# Altium PCB somiqboard.PcbDoc (part 10 of 10)
Units mm, origin at the board's own origin, x right, y up, seen from the top; angles counter-clockwise.
Board outline 110 x 96 mm, 4 copper layers (Top Layer, Ground_Plane, Power_Plane, Bottom Layer), stack 1.454 mm thick; 221 components, 356 nets, 1185 pads, 539 vias.
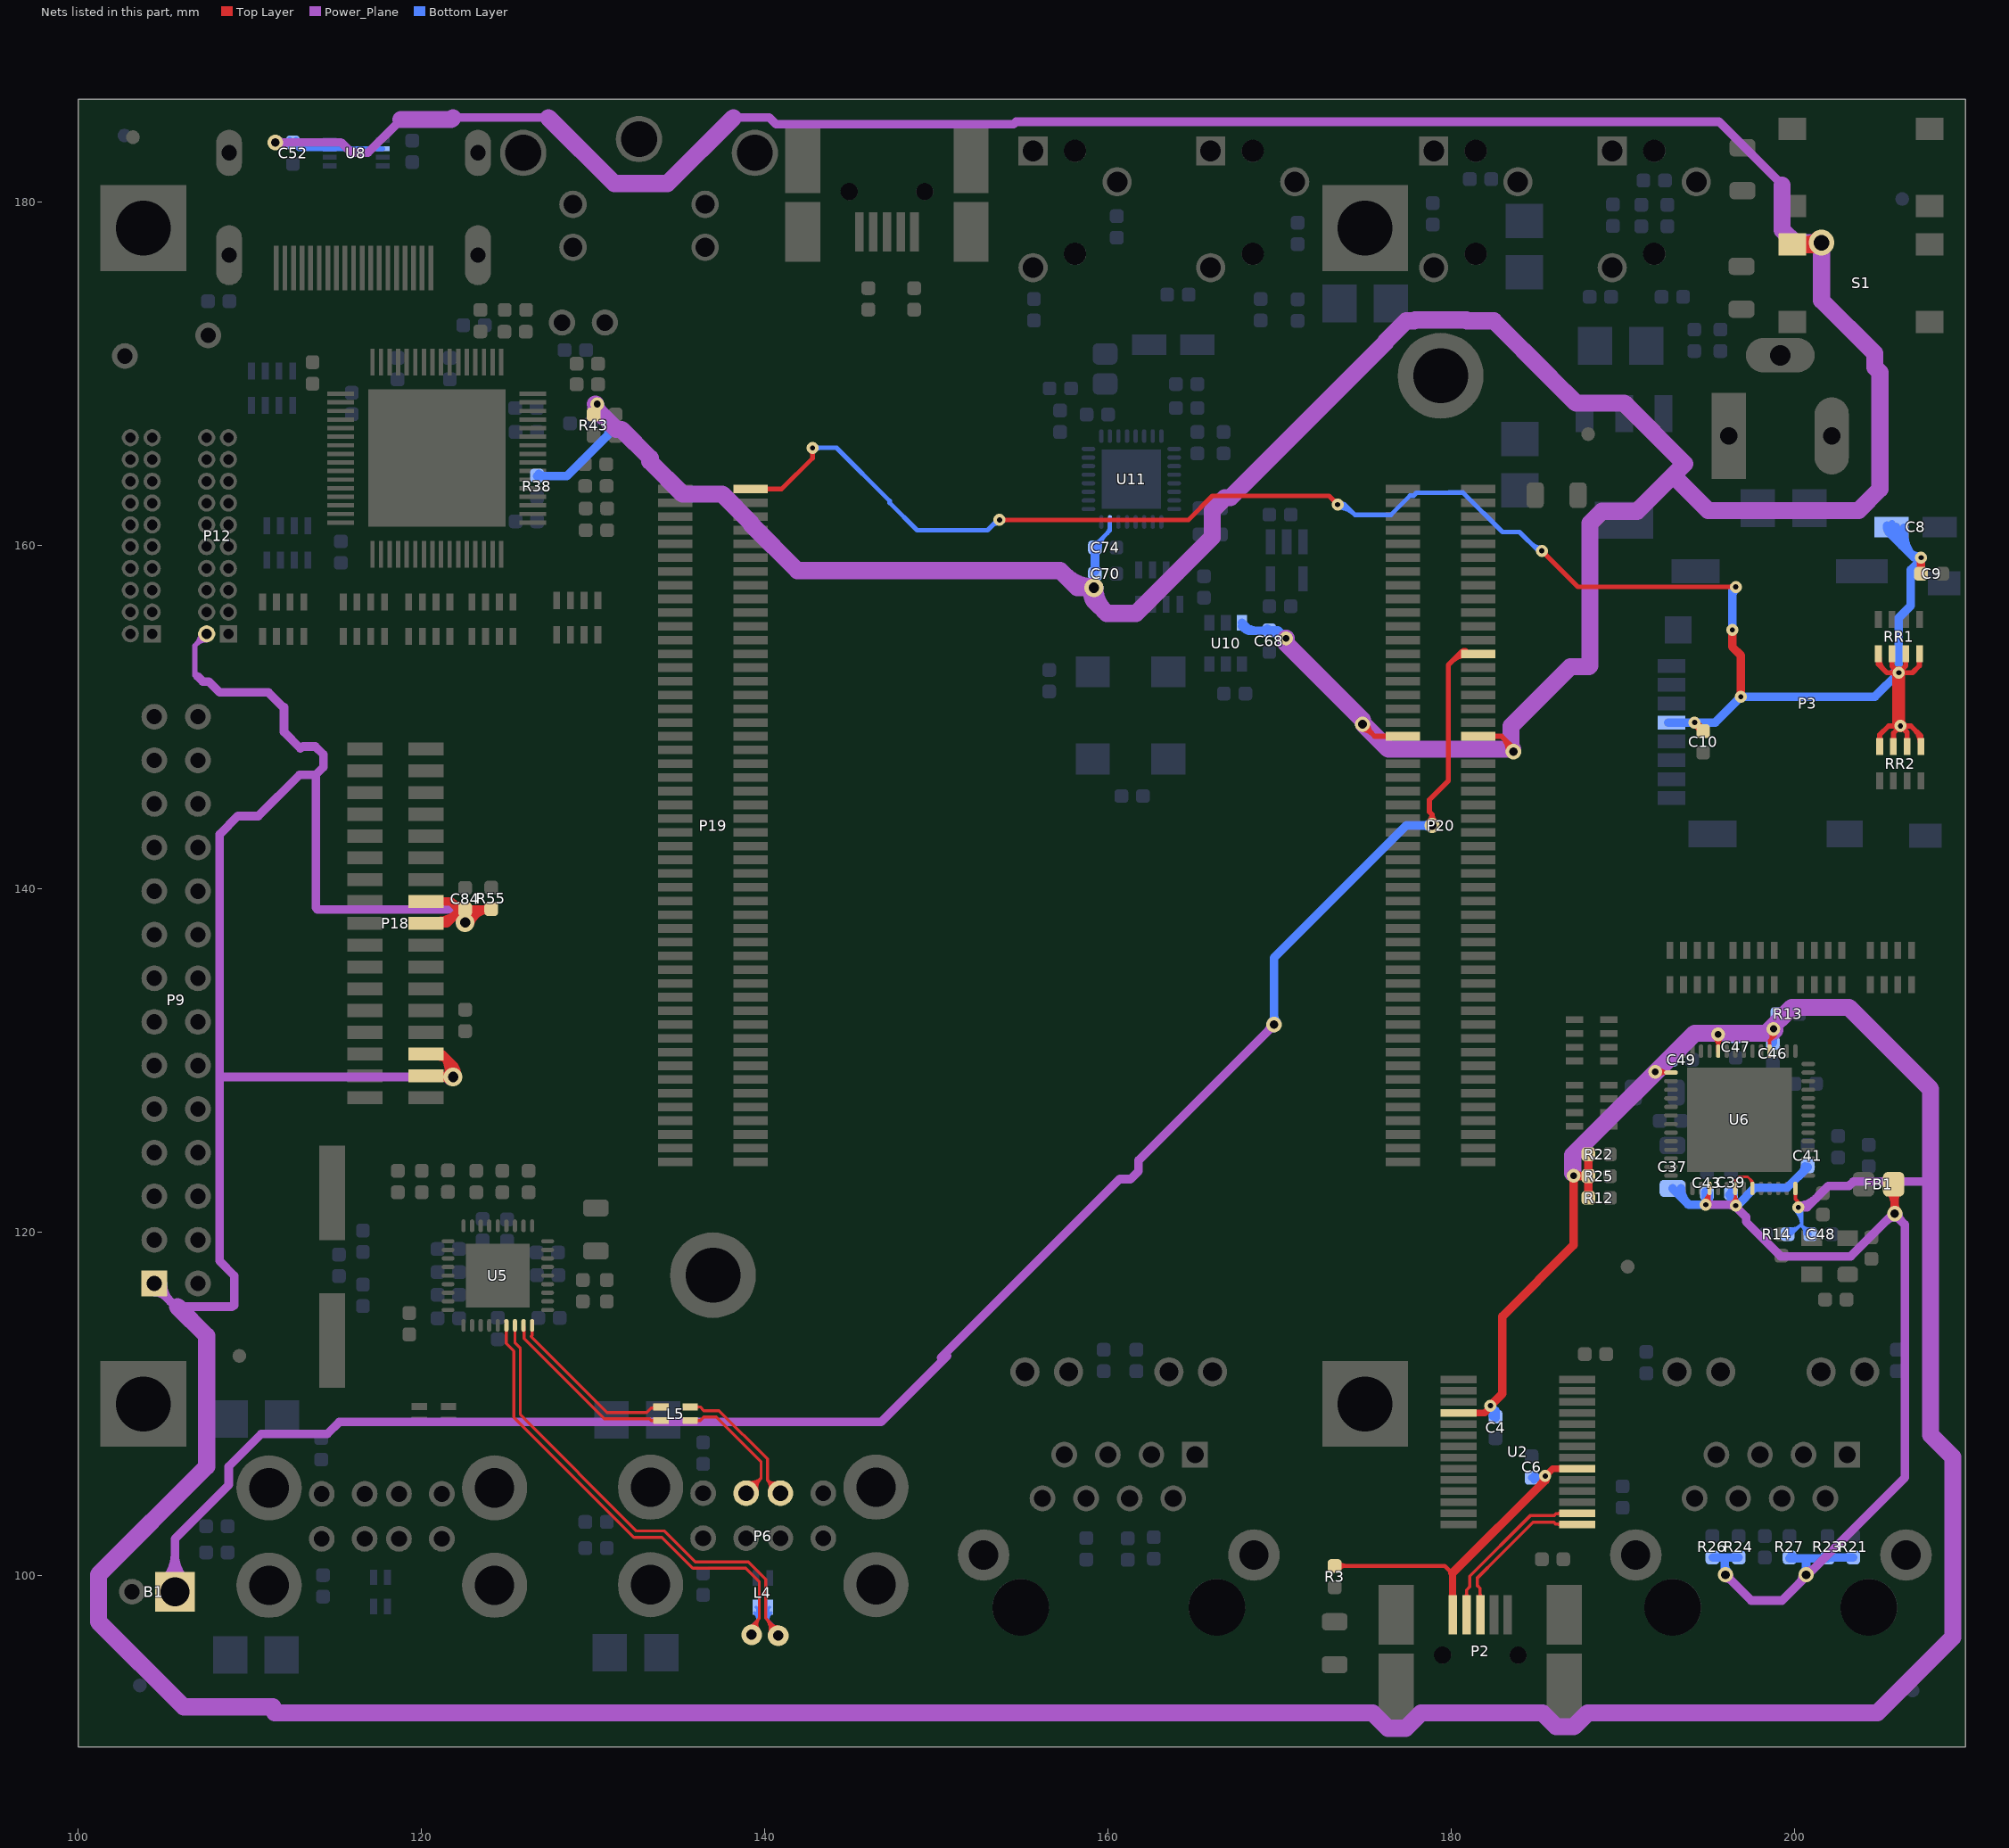
[diagram p12: the nets of this part, all layers, seen from the top]

## Via types
v1: diameter 0.7/0.7/0.7/0.7 (per signal layer), hole 0.3, Top Layer to Bottom Layer, tented both sides, 270 vias
v2: diameter 0.8, hole 0.3, Top Layer to Bottom Layer, tented both sides, 49 vias
v3: diameter 0.6/0.7/0.7/0.6 (per signal layer), hole 0.3, Top Layer to Bottom Layer, tented both sides, 47 vias
v4: diameter 0.6, hole 0.3, Top Layer to Bottom Layer, tented both sides, 43 vias
v5: diameter 1.1/1.1/1.1/1.1 (per signal layer), hole 0.6, Top Layer to Bottom Layer, tented both sides, 32 vias
v6: diameter 0.8/0.8/0.8/0.8 (per signal layer), hole 0.4, Top Layer to Bottom Layer, tented both sides, 31 vias
v7: diameter 0.9/0.9/0.9/0.9 (per signal layer), hole 0.5, Top Layer to Bottom Layer, tented both sides, 29 vias
v8: diameter 1.5/1.5/1.5/1.5 (per signal layer), hole 0.9, Top Layer to Bottom Layer, tented both sides, 14 vias
v9: diameter 1.2/1.2/1.2/1.2 (per signal layer), hole 0.6, Top Layer to Bottom Layer, tented both sides, 10 vias
v10: diameter 0.8/0.8/0.8/0.8 (per signal layer), hole 0.5, Top Layer to Bottom Layer, tented both sides, 6 vias
v11: diameter 1/1/1/1 (per signal layer), hole 0.5, Top Layer to Bottom Layer, tented both sides, 3 vias
v12: diameter 0.8/0.8/0.8/0.8 (per signal layer), hole 0.8, Top Layer to Bottom Layer, tented both sides, 2 vias
v13: diameter 1.2/1.2/1.2/1.2 (per signal layer), hole 1.2, Top Layer to Bottom Layer, tented both sides, 2 vias
v14: diameter 0.6/0.6/0.6/0.6 (per signal layer), hole 0.3, Top Layer to Bottom Layer, tented both sides, 1 vias

## Nets (pads, with @x,y where several pads share a name; then routed paths per layer and width w, separated by ;. In a path a pad name is that pad's centre, name@x,y a point inside that pad or via, vN(x,y) a via of type N, cw(c..) or ccw(c..) an arc to the next point about the centre after c; other vN are vias at no path point) (continued)
USB3_N: L4.1 U5.6 | length 30.4
  Top Layer w0.173: U5.6@124.96,114.499 124.96,113.513 125.4,113.072 125.4,109.222 132.395,102.227 134.023,102.227 135.823,100.427 138.9,100.427 139.7,99.627 139.7,97.514 ; v9@139.186,97 139.7,97.514 ; v9@139.383,96.652 cw(c139.734,96.922) 139.421,97.235 ; v9@139.52,96.757 cw(c139.892,97.043) 139.561,97.374 ; v9@139.657,96.863 cw(c140.05,97.164) 139.7,97.513
  Bottom Layer w0.173: v9@139.186,97 139.6,97.414 139.6,98.062 L4.1@139.503,98.159 ; L4.1@139.423,97.829 cw(c139.002,97.404) 139.6,97.404
  other v9: 139.25,96.55
USB3_P: L4.4 U5.7 | length 34.2
  Top Layer w0.173: U5.7@125.46,114.499 125.46,113.54 125.773,113.227 125.773,109.377 132.55,102.6 134.177,102.6 135.978,100.8 139.054,100.8 140.073,99.781 140.073,97.514 ; 140.283,97.303 cw(c139.765,96.785) v9@140.472,96.59 ; v9@140.305,96.636 ccw(c139.435,96.876) 140.073,97.513 ; 140.412,97.174 ccw(c140.8,97.562) v9@140.8,97.013 ; 140.494,97.093 cw(c140.095,96.694) v9@140.639,96.544 ; v9@140.8,96.45 v9(140.8,96.5) 140.8,96.786 140.073,97.514
  Bottom Layer w0.173: L4.4@140.303,98.159 140.2,98.056 140.2,97.387 ; v9@140.329,96.705 ccw(c139.764,96.951) 140.2,97.386 ; 140.38,97.207 cw(c140.015,96.842) v9@140.488,96.636 ; L4.4@140.383,97.829 ccw(c140.826,97.386) 140.2,97.386 ; 140.412,97.174 ccw(c140.8,97.562) v9@140.8,97.013 ; v9@140.8,96.45 v9(140.8,96.5) 140.8,96.786 140.2,97.387
USB4__N: L5.2 P6.B2 | length 10.7
  Top Layer w0.173: L5.2@135.673,109.023 136.25,109.023 136.463,109.237 137.2,109.237 139.8,106.637 139.8,105.67 ; L5.2@136.003,108.943 cw(c136.197,108.749) 136.197,109.023 cw(c136.197,109.297) L5.2@136.003,109.103 ; P6.B2@138.929,104.799 139.8,105.67 ; P6.B2@139.027,105.279 ccw(c139.148,105.868) 139.573,105.443 ccw(c139.998,105.018) P6.B2@139.409,104.897 ; P6.B2@139.062,105.449 ccw(c139.225,106.245) 139.8,105.67 ; P6.B2@139.579,104.932 cw(c140.375,105.096) 139.8,105.67
USB4__P: L5.3 P6.B3 | length 10.5
  Top Layer w0.173: L5.3@135.673,109.823 136.25,109.823 136.463,109.61 137.355,109.61 140.173,106.791 140.173,105.554 ; L5.3@136.003,109.743 cw(c136.197,109.549) 136.197,109.823 cw(c136.197,110.097) L5.3@136.003,109.903 ; P6.B3@140.3,105.011 ccw(c139.799,105.181) 140.173,105.554 ; P6.B3@140.464,104.956 ccw(c140.094,105.081) 140.37,105.357 ccw(c140.646,105.634) P6.B3@140.772,105.263 ; P6.B3@140.716,105.427 cw(c140.547,105.928) 140.173,105.554 ; P6.B3@140.929,104.799 140.173,105.554
USB4_N: L5.1 U5.8 | length 11.3
  Top Layer w0.173: U5.8@125.933,114.298 cw(c125.78,114.145) 125.996,114.145 ; U5.8@125.96,114.499 125.996,114.463 125.996,113.809 126.027,113.778 126.027,113.773 130.673,109.127 133.296,109.127 133.4,109.023 L5.1@133.973,109.023 ; L5.1@133.643,108.943 ccw(c133.449,108.749) 133.449,109.023 ccw(c133.449,109.297) L5.1@133.643,109.103
USB4_P: L5.4 U5.9 | length 10.4
  Top Layer w0.173: U5.9@126.46,114.499 126.46,114 126.396,113.936 126.4,113.933 126.4,113.927 130.827,109.5 133.15,109.5 133.4,109.75 ; L5.4@133.625,109.88 cw(c133.4,110.01) 133.4,109.75 ; L5.4@133.973,109.823 133.9,109.75 133.4,109.75
USB_X8_N: P2.3 U2.15 | length 9.4
  Top Layer w0.186: P2.3@181.605,98.726 ccw(c181.375,98.956) 181.7,98.956 ; P2.3@181.7,97.9 181.7,99.26 181.53,99.43 181.53,99.85 182.815,101.135 184.78,103.1 186,103.1 186.1,103 U2.15@186.4,103 ; 181.7,99.033 ccw(c182.133,99.033) P2.3@181.827,98.726 ; 186.146,103 cw(c186.146,102.596) U2.15@186.432,102.882 ; 186.267,103 ccw(c186.267,103.233) U2.15@186.432,103.068
USB_X8_P: P2.2 U2.16 | length 11.1
  Top Layer w0.186: P2.2@180.805,98.726 ccw(c180.537,98.994) 180.916,98.994 ccw(c181.295,98.994) P2.2@181.027,98.726 ; P2.2@180.916,97.715 180.916,99.166 181.1,99.35 ; 181.105,99.35 181.105,99.971 184.62,103.486 186,103.486 186.114,103.6 U2.16@187.3,103.6 ; 186.146,103.6 ccw(c186.146,104.004) U2.16@186.432,103.718 ; 186.267,103.6 cw(c186.267,103.367) U2.16@186.432,103.532
VBACKUP: B1.1 P20.25 | length 116.9
  Top Layer w0.3: v7@178.708,143.931 ccw(c178.368,144.339) 178.9,144.339 ; v7(178.9,143.7) 178.9,144.339 ; v7@179.092,143.93 cw(c179.432,144.339) 178.9,144.339 ; 180.082,153.282 cw(c180.85,152.514) P20.25@180.85,153.6 ; 180.594,153.794 cw(c180.85,153.538) P20.25@180.85,153.9 ; P20.25@181.65,153.7 P20.25@181.6,153.7 180.5,153.7 179.85,153.05 179.85,146.3 178.75,145.2 178.75,144.489 178.9,144.339
  Power_Plane w0.5: B1.1@105.008,99.696 ccw(c103.471,101.233) 105.644,101.233 ccw(c107.817,101.233) B1.1@106.28,99.696 ; B1.1@105.644,99.06 105.644,102.144 108.78,105.28 108.78,106.354 110.676,108.25 114.523,108.25 115.223,108.95 146.8,108.95 150.65,112.8 ; 150.3,112.7 160.7,123.1 161.331,123.1 161.8,123.569 161.8,124.2 v7(169.7,132.1) ; v7@169.5,132.1 cw(c169.017,132.1) 169.359,131.759 cw(c169.7,131.417) v7@169.7,131.9
  Bottom Layer w0.5: v7@169.559,132.241 ccw(c169.217,132.583) 169.7,132.583 ccw(c170.183,132.583) v7@169.841,132.241 ; v7(169.7,132.1) 169.7,136 177.4,143.7 v7(178.9,143.7) ; v7@178.758,143.558 ccw(c178.417,143.217) 178.417,143.7 ccw(c178.417,144.183) v7@178.758,143.841
VBUS: C6.1 P2.1 R3.2 U2.20 | length 23.5
  Top Layer w0.25: R3.2@173.228,100.564 179.636,100.564 180.1,100.1 ; R3.2@173.422,100.37 cw(c173.892,99.9) 173.892,100.564 cw(c173.892,101.228) R3.2@173.422,100.758
  Top Layer w0.4: P2.1@180.1,97.65 180.1,100.1 180.1,100.15 ; v3(185.5,105.8) 185.925,106.225 U2.20@187.35,106.225
  Top Layer w0.5: 180.1,100.15 185.5,105.55 v3(185.5,105.8) v3@185.5,105.9 ; 185.238,105.288 ccw(c184.726,105.8) v3@185.45,105.8
  Bottom Layer w0.25: v3@185.5,105.55 v3(185.5,105.8)
  Bottom Layer w0.4: C6.1@184.7,105.7 185.4,105.7 v3(185.5,105.8) ; C6.1@184.841,105.559 cw(c185.183,105.217) 185.183,105.7 cw(c185.183,106.183) C6.1@184.841,105.841 ; C6.1@185.017,105.7 ccw(c185.017,106.283) v3@185.429,105.871
VCC_IO: C4.2 C46.2 C47.2 C48.2 C49.2 C52.2 C68.1 C70.1 C74.1 C84.1 P9.1 P12.2 P18.16 P18.18 P18.30 P18.32 P20.37 P20.38 R12.2 R13.2 R14.2 R22.2 R25.2 R38.1 R43.1 R55.2 S1.1 U2.4 U6.18 U6.24 U6.30 U6.56 U8.3 U8.6 U10.6 U11.7 | length 658.7
  Top Layer w0.2: U6.18@198.574,130.555 198.574,131.174 ; v6@198.581,131.644 cw(c198.335,131.413) 198.574,131.174 ; 198.72,131.32 ccw(c198.485,131.554) v6@198.727,131.781 ; v6@198.9,131.5 198.574,131.174 ; U6.56@200.074,122.555 200.074,121.926 v1@200.4,121.6
  Top Layer w0.25: v6@191.944,129.305 U6.30@192.824,129.305 ; v6@192.094,129.155 cw(c192.456,128.794) U6.30@192.456,129.305 ; v6@192.094,129.544 ccw(c192.672,130.122) U6.30@192.672,129.305 ; v6@195.38,131.332 cw(c194.91,130.862) 195.574,130.862 cw(c196.238,130.862) v6@195.768,131.332 ; U6.24@195.574,130.555 v6(195.574,131.526)
  Top Layer w0.3: v7@174.85,149.3 cw(c174.85,148.576) 175.362,149.088 cw(c175.874,149.6) v7@175.15,149.6 ; v7(174.85,149.6) 175.55,148.9 P20.38@177.2,148.9 ; P20.37@181.6,148.9 182.95,148.9 183.75,148.1 v7(183.65,148) ; 182.996,148.854 cw(c182.141,148) v7@183.35,148
  Top Layer w0.4: U2.4@180.45,109.475 181.975,109.475 v3@182.3,109.8 ; 182.059,109.559 ccw(c181.717,109.9) v3@182.2,109.9
  Top Layer w0.5: P18.32@120.266,129.109 v5@121.809,129.109 ; P18.30@120.266,130.379 P18.30@121.221,130.379 ; P18.18@120.266,137.999 121.499,137.999 C84.1@122.4,138.9 ; P18.16@120.266,139.269 121.731,139.269 ; P18.30@120.911,130.249 cw(c120.911,129.187) 121.662,129.938 ; P18.18@120.911,138.129 ccw(c120.911,139.862) 122.137,138.637 ; P18.32@120.983,129.109 cw(c120.983,128.183) v5@121.638,128.838 ; P18.32@121.268,129.109 ccw(c121.268,129.632) v5@121.638,129.262 ; v5@121.56,129.126 ccw(c120.3,129.458) P18.30@121.221,130.379 ; v5@121.643,129.267 ccw(c121.183,129.75) 121.85,129.75 ; 121.837,129.763 cw(c121.275,129.201) v5@122.043,128.999 ; v5@121.85,129.1 121.85,129.75 ; 121.882,138.382 cw(c122.555,137.71) C84.1@122.555,138.661 ; v5@122.057,129.267 cw(c122.517,129.75) 121.85,129.75 ; v5@122.343,138.257 ccw(c121.831,138.769) 122.555,138.769 ccw(c123.279,138.769) v5@122.767,138.257 ; v5@122.362,138.099 cw(c123.302,137.836) 123.302,138.811 ; C84.1@122.426,138.735 ccw(c122.05,138.514) 122.05,138.95 ; C84.1@122.461,138.928 cw(c122.268,139.168) 122.05,138.95 ; C84.1@122.546,138.961 cw(c122.48,140.018) 121.731,139.269 ; C84.1@122.55,138.95 122.05,138.95 ; v5(122.555,138.045) C84.1@122.555,138.811 123.961,138.811 ccw(c123.961,137.651) v5@122.844,137.964 ; 123.669,138.811 ccw(c123.669,139.241) R55.2@123.973,138.937 ; v6@170.4,154.45 v6(170.4,154.6) ; v3(182.3,109.9) 183,110.6 183,115.1 187.15,119.25 v6(187.15,123.3) ; v6@187.174,123.276 R25.2@188.017,123.276 ; v6@187.256,123.406 ccw(c187.57,123.72) 187.57,123.276 ; R12.2@188,121.95 188.017,121.967 R12.2@188.017,122.006 R25.2@188.017,123.276 ; R22.2@188.017,124.546 R25.2@188.017,123.276 ; P18.30@121.221,130.379 121.85,129.75 ; 121.731,139.269 122.05,138.95
  Top Layer w1: S1.1@199.898,177.546 v8@201.596,177.546 ; 200.732,177.546 ccw(c200.732,178.518) v8@201.419,177.831
  Power_Plane w0.3: 106.8,152.45 106.8,154.171 P12.2@107.493,154.864 ; P12.2@107.143,154.864 cw(c106.298,154.864) 106.896,154.267 cw(c107.493,153.669) P12.2@107.493,154.514
  Power_Plane w0.5: P9.1@104.445,116.518 cw(c104.445,115.584) 105.106,116.244 ; P9.1@104.45,117.05 P9.1@104.463,117.036 ; P9.1@104.5,116.85 105.682,115.668 105.795,115.668 108.968,115.668 109.1,115.8 ; P9.1@104.945,117.018 ccw(c106.425,117.018) 105.378,115.972 ; 106.95,152.402 107.264,152.088 107.622,152.088 108.26,151.45 111.1,151.45 111.9,150.65 ; 109.1,115.725 109.1,115.8 ; v7(111.495,183.495) 115.32,183.495 115.915,182.9 116.9,182.9 118.825,184.825 ; v7@111.636,183.354 cw(c111.978,183.012) 111.978,183.495 cw(c111.978,183.978) v7@111.636,183.636 ; 112,150.602 112,149.15 112.95,148.2 ; 113.118,148.3 113.831,148.3 114.3,147.831 114.3,147.099 113.85,146.65 ; 113.85,138.9 113.85,146.65 ; 113.95,138.8 118.631,138.8 121.8,138.8 ; v5@121.638,128.838 ccw(c121.126,128.326) 121.126,129.05 ccw(c121.126,129.774) v5@121.638,129.262 ; v5(121.85,129.05) 108.25,129.05 ; 121.85,138.8 v5@122.55,138.1 ; 121.853,184.937 125.09,184.937 127.412,184.938 ; 122.008,138.642 cw(c121.41,138.045) v5@122.255,138.045 ; 122.128,138.522 ccw(c122.555,138.949) v5@122.555,138.345 ; 138.188,184.938 140.289,184.938 140.676,184.55 154.511,184.55 ; 154.522,184.56 154.661,184.7 195.626,184.7 199.4,180.926 ; v1(200.25,121.45) 200.75,121.45 202,122.7 203.2,122.7 203.45,122.95 207.9,122.95 ; v1@200.25,121.55 ccw(c200.25,122.999) 201.274,121.974 ; 108.25,129.05 108.25,118.325 109.1,117.475 109.1,115.8 ; 108.25,129.05 108.25,143.194 109.306,144.25 110.5,144.25 112.9,146.65 113.85,146.65
  Power_Plane w1: P9.1@104.445,117.018 P9.1@104.556,116.907 ; 105.795,115.668 107.494,113.969 107.494,106.35 101.2,100.056 101.2,97.3 106.15,92.35 111.35,92.35 ; 111.45,92 175.432,92 176.332,91.1 177.368,91.1 178.268,92 185.332,92 186.132,91.2 187.168,91.2 187.968,92 204.85,92 209.25,96.4 209.25,106.9 207.95,108.2 207.95,128.35 203.2,133.1 199.865,133.1 198.395,131.63 ; 118.825,184.825 121.74,184.825 121.853,184.937 ; 127.412,184.938 131.25,181.1 134.35,181.1 138.188,184.938 ; 130.45,167.7 131.375,166.775 131.675,166.775 133.35,165.1 133.35,164.95 ; 133.317,164.917 135.235,163 137.535,163 139.2,161.335 139.2,161.269 141.919,158.55 157.235,158.55 158.235,157.55 v5(159.2,157.55) ; 157.468,158.317 ccw(c159.2,160.049) v5@159.2,157.6 ; v5@159.237,157.516 ccw(c159.656,157.14) 159.258,156.742 ; v5@159.25,157.55 ccw(c161.18,157.55) 159.815,156.185 ; v5@159.258,157.04 159.258,156.742 ; 166.833,162.8 166.1,162.067 166.1,160.5 161.65,156.05 159.95,156.05 159.258,156.742 ; 167.15,162.8 176.2,171.85 ; v6(170.4,154.6) 170.4,154.3 v7@174.85,149.85 ; v7@174.9,149.6 176.35,148.15 v7@183.6,148.15 ; 176.2,171.9 177.4,173.1 177.862,173.1 177.912,173.15 180.888,173.15 180.938,173.1 182.5,173.1 185.844,169.756 185.844,169.75 187.294,168.3 190.1,168.3 193.625,164.775 192.95,164.1 ; 183.5,148.508 183.5,149.485 186.965,152.95 188.05,152.95 ; v6@187.1,123.45 187.1,124.5 194.2,131.6 198.4,131.6 ; 188.1,153 188.1,161.3 188.8,162 190.85,162 192.95,164.1 ; 198.438,131.6 ccw(c198.438,132.211) v6@198.87,131.779 ; 199.3,181 199.3,178.4 200.046,177.654 v8(201.596,177.654) ; v8@201.6,177.7 201.6,174.3 204.7,171.2 204.7,170.4 205,170.1 205,163.3 203.75,162.05 195,162.05 192.95,164.1 ; v6@130.15,168.25 ccw(c130.752,168.25) 130.326,167.824 cw(c130.752,168.25) v6@130.15,168.25
  Bottom Layer w0.2: R13.2@199.029,132.7 R13.2@199.029,132.715 ; R14.2@199.624,119.888 199.838,119.888 200.35,120.4 cw(c199.802,120.948) R14.2@199.674,120.184 ; R14.2@199.641,119.987 ccw(c199.723,120.478) 200.076,120.126 ; v1@200.073,121.273 cw(c199.164,120.364) 200.45,120.364 ; v1@200.215,121.415 cw(c199.646,120.846) 200.45,120.846 ; v1@200.45,121.45 200.45,120.372 ; C48.2@200.634,119.9 ccw(c200.004,119.926) 200.45,120.372 ; C48.2@200.922,120.188 cw(c200.896,120.818) 200.45,120.372 ; C48.2@200.934,119.888 200.45,120.372
  Bottom Layer w0.25: C74.1@159.258,160.168 ccw(c159.258,160.554) 159.531,160.281 ; C74.1@159.3,160.05 160.127,160.877 U11.7@160.127,161.385 ; C74.1@159.533,159.893 cw(c160.475,159.893) 159.809,160.559 ; 159.962,160.712 ccw(c159.563,161.11) U11.7@160.127,161.11 ; v6@191.9,129.625 ccw(c191.9,130.048) 192.199,129.749 ; v6@191.971,129.615 ccw(c192.082,130.031) 192.298,129.658 ; v6@192.173,129.318 cw(c192.744,129.252) C49.2@192.456,129.75 ; v6@192.175,129.35 cw(c193.08,129.35) C49.2@192.44,129.99 ; 192.257,129.807 cw(c192.78,129.284) C49.2@192.805,130.023 ; C49.2@192.797,129.773 ccw(c192.753,128.497) 191.85,129.4 192.498,130.048 C49.2@192.806,130.048
  Bottom Layer w0.27: U8.3@114.6,183.145 U8.3@114.615,183.13 ; U8.3@114.655,183.13 U8.6@117.755,183.13
  Bottom Layer w0.3: v7(111.495,183.495) C52.2@112.505,183.495 ; v7@111.707,183.283 cw(c112.219,182.771) 112.219,183.495 cw(c112.219,184.219) v7@111.707,183.707 ; v7@111.755,183.345 cw(c112.058,183.17) 111.967,183.508 ; v7@111.755,183.346 cw(c111.972,183.222) 112.037,183.463 ; 111.967,183.482 cw(c112.058,183.82) 111.755,183.645 ccw(c111.972,183.768) 112.037,183.527 ; C52.2@112.345,183.318 ccw(c111.918,182.891) 111.918,183.495 ccw(c111.918,184.099) C52.2@112.345,183.672 ; C52.2@112.487,183.46 ccw(c113.282,184.255) 113.282,183.13 ; C52.2@112.522,183.495 C52.2@112.505,183.495 ; C52.2@112.699,183.672 ccw(c114.007,184.98) 114.007,183.13 ; U8.3@114.655,183.13 114.615,183.13 112.87,183.13 C52.2@112.505,183.495
  Bottom Layer w0.5: R38.1@126.75,164.05 128.478,164.05 130.9,166.472 130.9,167.472 v6@130.186,168.186 ; R38.1@126.852,164.19 ccw(c127.19,164.528) 127.19,164.05 ; v6@130.4,168.25 ccw(c131.069,168.25) 130.596,167.777 ; C70.1@159.258,158.508 C74.1@159.258,159.893 ; U10.6@167.828,155.305 cw(c167.828,154.822) 168.169,155.164 ; U10.6@167.828,155.505 168.283,155.05 ; U10.6@167.863,155.39 ccw(c168.685,156.212) 168.685,155.05 ; U10.6@167.877,155.367 ccw(c168.283,155.469) 168.283,155.05 ; 169.015,155.05 ccw(c169.015,155.47) C68.1@169.312,155.173 ; C68.1@169.418,155.067 169.933,155.067 v6(170.4,154.6) ccw(c169.602,153.803) C68.1@169.44,154.919 ; C68.1@169.5,155.05 168.283,155.05 ; v3@182.269,109.861 cw(c181.743,109.184) C4.2@182.6,109.184 ; C4.2@182.456,109.292 ccw(c181.864,109.464) v3(182.3,109.9) 182.6,109.6 C4.2@182.6,109.25 ; v6@195.5,131.6 v6(195.574,131.526) 195.675,131.425 C47.2@196.596,131.425 ; v6@195.68,131.632 ccw(c196.18,132.132) 196.18,131.425 ; v6@198.694,131.956 ccw(c197.954,132.696) R13.2@199,132.696 ; C46.2@198.755,131.044 v6@198.755,131.845 ; C46.2@198.755,131.38 cw(c199.269,131.38) v6@198.906,131.744 ; v6@199,132.09 R13.2@199,132.7 ; 199,132.283 cw(c199.461,132.283) R13.2@199.135,132.609
  other v6: 191.9,129.35 198.8,131.85 130.25,168.25
VDD_A: C37.1 C39.2 C41.2 C43.2 FB1.1 R21.1 R23.1 R24.1 R26.1 R27.1 U6.46 U6.49 U6.51 | length 82.8
  Top Layer w0.15: v1@194.693,121.826 ccw(c194.186,122.555) U6.46@195.074,122.555 195.074,121.774 194.9,121.6 v1(194.85,121.6) ; v1@194.778,121.702 ccw(c194.385,122.268) U6.46@195.074,122.268 ; v1@194.864,121.579 ccw(c194.585,121.981) 195.074,121.981 ; v1@196.406,121.744 ccw(c195.999,122.151) 196.574,122.151 ; v1@196.574,121.55 U6.49@196.574,122.555 196.574,123.024 196.78,123.23 197.3,123.23 197.55,122.98 ; 196.574,121.915 ccw(c196.965,121.915) v1@196.688,121.638 ; U6.49@196.574,122.277 ccw(c197.327,122.277) v1@196.794,121.744 ; 197.4,123.13 cw(c197.099,122.83) U6.51@197.524,122.83 ; U6.51@197.55,122.5 197.55,122.98 ; U6.51@197.604,122.87 cw(c197.689,122.98) 197.55,122.98
  Top Layer w0.5: FB1.1@205.535,122.435 cw(c204.733,121.633) 205.867,121.633 ; v7@205.726,121.224 ccw(c205.384,121.566) 205.867,121.566 ccw(c206.35,121.566) v7@206.008,121.224 ; v7(205.867,121.083) FB1.1@205.867,122.428 ; 205.867,121.956 cw(c206.544,121.956) FB1.1@206.065,122.435
  Power_Plane w0.5: v1@194.85,121.6 196.4,121.6 196.45,121.65 197.2,120.9 197.2,120.618 199.218,118.6 203.3,118.6 205.8,121.1 206.45,120.45 206.45,105.7 199.3,98.55 197.5,98.55 v7(196,100.05) ; v7@196,99.85 cw(c196,99.367) 196.341,99.709 cw(c196.683,100.05) v7@196.2,100.05 ; 196.238,121.6 cw(c196.238,121.188) v1@196.529,121.479 ; 200.288,99.538 ccw(c199.776,100.05) v7@200.5,100.05 ; v7@200.7,100.25 ccw(c200.7,100.974) 201.212,100.462 ; 205.382,120.682 cw(c205.867,120.197) v7@205.867,120.883 ; v7@206.067,121.083 ccw(c206.671,121.083) 206.244,120.656
  Bottom Layer w0.5: C37.1@192.913,122.555 193.818,121.65 ; C37.1@193.413,122.555 ccw(c194.62,122.555) 193.767,121.701 ; 193.8,121.65 193.85,121.6 v1(194.85,121.6) ; v1@194.779,121.67 ccw(c194.185,122.265) C43.2@195.025,122.265 ; C43.2@194.838,122.128 cw(c194.579,121.765) v1@195.025,121.765 ; v1@194.85,121.706 cw(c195.469,121.706) C43.2@195.031,122.144 ; C43.2@194.85,122.35 v1(194.85,121.6) ; C43.2@195.025,122.275 195.025,121.775 v1(194.85,121.6) ; R26.1@195.25,101.05 195.254,101.054 195.95,101.054 ; 195.95,100.654 ccw(c196.604,100.654) v7@196.141,100.191 ; v7(196,100.05) 196,100.2 195.95,100.25 195.95,101.054 ; C39.2@196.219,122.169 cw(c195.903,121.853) 196.35,121.853 ; C39.2@196.278,122.122 ccw(c197.049,122.328) v1@196.65,121.637 ; C39.2@196.464,122.219 ccw(c197.037,121.987) v1(196.6,121.55) ; v1@196.6,121.65 ccw(c196.6,122.072) 196.899,121.774 ; v1@196.668,121.623 cw(c197.339,122.35) 196.35,122.35 196.35,121.8 v1(196.6,121.55) ; R24.1@196.763,101.054 195.95,101.054 ; R27.1@199.735,101 200.7,101 ; R27.1@199.841,101.16 ccw(c200.228,101.547) 200.228,101 ; C41.2@200.49,123.49 ccw(c200.135,123.845) C41.2@200.637,123.845 ; v7@200.559,100.191 ccw(c200.218,100.532) 200.7,100.532 ; v7@200.7,100.1 200.7,101 ; 200.7,100.534 ccw(c201.184,100.534) v7@200.841,100.191 ; C41.2@200.8,123.8 199.595,122.595 197.72,122.595 196.675,121.55 v1(196.6,121.55) ; 201.453,101 ccw(c201.453,101.547) R23.1@201.84,101.16 ; R23.1@201.946,101 200.7,101 ; R23.1@201.95,101 202.004,101.054 R21.1@203.445,101.054
  other v7: 200.7,100.05
VMMC1: C8.1 C9.1 C10.1 P3.4 P19.1 RR1.5 RR1.6 RR1.7 RR1.8 RR2.5 RR2.6 RR2.7 RR2.8 | length 133.9
  Top Layer w0.27: P19.1@139.2,163.3 141,163.3 142.8,165.1 v3(142.8,165.7) ; P19.1@140.031,163.219 cw(c140.228,163.022) 140.228,163.3 cw(c140.228,163.578) P19.1@140.031,163.381 ; v3@142.683,165.583 cw(c142.402,165.302) 142.8,165.302 cw(c143.198,165.302) v3@142.917,165.583 ; v3(153.7,161.5) 164.7,161.5 166.1,162.9 172.9,162.9 v3(173.4,162.4) ; v3@153.817,161.383 cw(c154.098,161.102) 154.098,161.5 cw(c154.098,161.898) v3@153.817,161.617 ; v3@173.235,162.4 ccw(c172.837,162.4) 173.118,162.682 ccw(c173.4,162.963) v3@173.4,162.565 ; v3@185.3,159.535 cw(c185.3,159.137) 185.582,159.418 cw(c185.863,159.7) v3@185.465,159.7 ; v3(185.3,159.7) 187.4,157.6 v3(196.6,157.6) ; v3@196.483,157.483 ccw(c196.202,157.202) 196.202,157.6 ccw(c196.202,157.998) v3@196.483,157.717
  Top Layer w0.3: RR1.5@204.906,153.705 204.906,153.094 205.4,152.6 v3(206.1,152.6) ; RR1.5@204.956,153.405 ccw(c205.829,153.405) 205.212,152.788 ; RR2.8@204.987,148.301 204.987,148.987 205.5,149.5 v3(206.2,149.5) ; RR1.6@205.706,153.705 205.706,152.994 v3(206.1,152.6) ; RR2.7@205.787,148.301 205.787,149.087 v3(206.2,149.5) ; v3@205.95,152.6 ccw(c205.588,152.6) 205.844,152.856 ccw(c206.1,153.112) 206.1,152.75 ccw(c206.1,153.112) 206.356,152.856 ccw(c206.612,152.6) v3@206.25,152.6 ; v3@205.994,152.494 ccw(c205.738,152.238) 205.738,152.6 ccw(c205.738,152.962) v3@205.994,152.706 ; v3@206.05,149.5 cw(c205.688,149.5) 205.944,149.244 cw(c206.2,148.988) 206.2,149.35 cw(c206.2,148.988) 206.456,149.244 cw(c206.712,149.5) v3@206.35,149.5 ; v3@206.094,149.394 ccw(c205.838,149.138) 205.838,149.5 ccw(c205.838,149.862) v3@206.094,149.606 ; v3@206.206,152.494 cw(c206.462,152.238) 206.462,152.6 cw(c206.462,152.962) v3@206.206,152.706 ; v3@206.306,149.394 cw(c206.562,149.138) 206.562,149.5 cw(c206.562,149.862) v3@206.306,149.606 ; RR1.7@206.506,153.705 206.506,153.006 v3(206.1,152.6) ; RR2.6@206.587,148.301 206.587,149.113 v3(206.2,149.5) ; 207.08,149.22 cw(c206.461,148.601) RR2.5@207.337,148.601 ; RR1.8@207.306,153.705 207.306,153.006 206.9,152.6 v3(206.1,152.6) ; RR2.5@207.387,148.301 207.387,148.913 206.8,149.5 v3(206.2,149.5)
  Top Layer w0.5: v3(194.2,149.7) C10.1@194.7,149.2 ; v3(196.4,155.1) 196.4,154.1 196.9,153.6 v3(196.9,151.2) ; C9.1@207.391,158.369 207.391,159.291 v3(207.4,159.3)
  Top Layer w0.75: v3(206.1,152.6) 206.1,149.6 v3(206.2,149.5)
  Power_Plane w0.5: v3@205.8,152.6 v3(206.1,152.6) v3@206.2,152.6
  Bottom Layer w0.27: v3(142.8,165.7) 144.2,165.7 147.3,162.6 147.3,162.5 148.9,160.9 153,160.9 v3@153.7,161.6 ; v3@142.917,165.583 cw(c143.198,165.302) 143.198,165.7 cw(c143.198,166.098) v3@142.917,165.817 ; 153.248,161.148 cw(c153.7,160.695) v3@153.7,161.335 ; v3@173.4,162.235 cw(c173.4,160.871) 174.365,161.835 ; v3(173.4,162.4) 173.8,162.4 174.4,161.8 176.5,161.8 177.615,162.915 177.829,162.915 177.999,163.085 179.88,163.085 ; v3@173.4,162.505 cw(c173.4,161.793) 173.904,162.296 ; v3@173.517,162.283 cw(c173.798,162.002) 173.798,162.4 cw(c173.798,162.798) v3@173.517,162.517 ; 179.9,163.1 180.7,163.1 183,160.8 184,160.8 v3@185.1,159.7 ; 184.677,160.123 ccw(c185.3,160.746) v3@185.3,159.865
  Bottom Layer w0.4: C8.1@205.7,160.8 C8.1@205.7,161.3
  Bottom Layer w0.5: P3.4@192.65,149.7 P3.4@192.85,149.7 v3(194.2,149.7) 195.4,149.7 v3(196.9,151.2) 204.7,151.2 v3(206.1,152.6) 206.1,155.8 206.8,156.5 206.8,158.6 v3@207.5,159.3 ; v3(196.4,155.1) 196.4,157.4 v3(196.6,157.6) ; 196.4,156.996 cw(c197.204,156.996) v3@196.635,157.565 ; C8.1@205.425,161.172 ccw(c205.952,161.1) C8.1@205.576,160.724 ; C8.1@205.669,161.083 205.669,160.631 207,159.3 ; C8.1@205.921,161.104 ccw(c207.204,160.928) 206.288,160.012 ; C8.1@206.416,161.036 ccw(c208.456,160.756) 207,159.3 ; 206.632,159.668 ccw(c207.4,160.436) v3@207.4,159.35 ; v3(207.4,159.3) 207,159.3
pads on no net: P2.4 P2.SYSPAD10 P2.SYSPAD11 P4.SYSPAD10 P4.SYSPAD11 P5.5 P5.6 P5.7 P5.8 P6.5 P6.6 P6.7 P6.8 P7.0 P8.0 P9.25 P10.13 P10.14 P10.19 P14.0 P15.0 P16.0 P17.0 P20.35 P20.39 RR4.4 RR4.5 S1.2 S1.3 S2.1 S2.4 U2.2 U2.3 U2.6 U2.8 U2.9 U2.10 U2.11 U2.12 U2.13 U2.14 U2.19 U2.22 U2.23 U2.24 U2.27 U2.28 U5.12 U5.13 U5.16 U5.17 U5.18 U5.19 U5.20 U5.21 U6.5 U6.38 U6.39 U6.40 U6.54 U9.4 U11.11 U11.13 U11.20 U11.22 U11.28 U11.30 X1.1 X2.1 X3.1 X4.1 X5.1 X6.1 X7.1 X8.1 Y3.1
copper on no net:
  other v12: 137,165.8 179.4,165.8
  other v13: 137,121.6 179.4,121.6

## Polygon pours and split planes (outlines as drawn)
GND on Bottom Layer "Bottom Layer-gnd" (solid, remove dead copper, pour order 9): 182.65,147.2 209.9,147.2 209.95,147.15 209.7,146.9 209.7,90.25 100.45,90.25 100.3,90.4 100.5,90.6 100.5,124.4 182.35,124.4 182.75,124.8
GND on Bottom Layer "Bottom Layer-gnd" (solid, remove dead copper, pour order 12): 113.35,168.75 119.3,174.7 119.4,174.7 119.4,176.1 122.8,179.5 122.95,179.35 124.55,179.35 124.55,177.85 130.15,172.25 134.55,167.85 134.55,167.7 137.05,167.7 137.4,167.35 138.5,166.25 138.5,165.25 138.5,163.6 138.25,163.35 137.2,162.3 131.45,162.3 131.25,162.3 123.5,154.55 123.15,154.9 113.35,154.9
3V3 on Bottom Layer "Bottom Layer-gnd" (solid, remove dead copper, pour order 15): 183.95,172.65 194.15,172.65 194.25,172.55 194.7,172.1 194.7,157.75 184.05,157.75 183.95,157.65
GND on Ground_Plane "Top Layer-No Net" (solid, pour order 16): 100.45,185.55 209.55,185.55 209.5,185.5 209.5,90.7 100.55,90.7 100.5,90.75
VCC_IO on Power_Plane "Top Layer-No Net" (solid, remove dead copper, pour order 13): 107.35,185.5 107.35,174.324 188.95,174.324 189,174.274 188.95,174.224 188.95,158.158 188.95,102.375 189.05,102.275 188.8,102.026 111.65,102.026 111.65,118.491 100.95,118.491 100.95,90.849 101.2,90.6 101.45,90.849 209.5,90.849 209.5,185.201 209.15,185.55
3V3 on Power_Plane "MidLayer1-No Net" (solid, remove dead copper, pour order 10): 107.3,173.7 107.4,173.8 188.15,173.8 188.45,173.5 188.45,102.55 112.2,102.55 112.15,102.5 112.15,126.067 122.8,126.067 122.85,126.117 122.85,132.671 122.85,139.576 122.8,139.626 122.55,139.876 117.4,139.876 114.6,139.876 114.35,140.126 114.1,140.377 114.1,149.233 114.05,149.233 111.15,152.135 108.25,155.037 107.45,155.037
3V3 on Power_Plane "MidLayer1-No Net" (solid, remove dead copper, pour order 14): 111.55,118.95 101,118.95 100.95,118.9 100.8,119.05 100.8,148.65 123.55,148.65 124.6,147.6 125.15,147.05 125.15,118.8
AGND on Top Layer "Top Layer-AGND" (solid, remove dead copper, pour order 11): 154.2,185.65 154.15,185.6 154.15,167.4 156.55,167.4 158.2,165.75 158.25,165.7 163.75,165.7 163.85,165.7 164.95,164.6 169.3,164.6 169.3,165.7 178.4,174.8 189.9,174.8 190.1,174.6 190.1,185.6

## Other copper
Power_Plane:
  pour cut-out: 194.6,108.55 192.2,106.15 192.2,103.55 192.35,103.55 193.25,102.65 202.6,102.65 202.6,102.8 205.3,105.5 205.3,107.7 205.2,107.7 204.3,108.6
  pour cut-out: 156.55,108.9 154.15,106.5 154.15,103.9 154.3,103.9 155.2,103 164.55,103 164.55,103.15 167.25,105.85 167.25,108.05 167.15,108.05 166.25,108.95
Ground_Plane:
  pour cut-out: 194.85,108.7 192.45,106.3 192.45,103.7 192.6,103.7 193.5,102.8 202.85,102.8 202.85,102.95 205.55,105.65 205.55,107.85 205.45,107.85 204.55,108.75
  pour cut-out: 156.55,108.75 154.15,106.35 154.15,103.75 154.3,103.75 155.2,102.85 164.55,102.85 164.55,103 167.25,105.7 167.25,107.9 167.15,107.9 166.25,108.8
Bottom Layer:
  pour cut-out: 194.85,108.7 192.45,106.3 192.45,103.7 192.6,103.7 193.5,102.8 202.85,102.8 202.85,102.95 205.55,105.65 205.55,107.85 205.45,107.85 204.55,108.75
  pour cut-out: 156.55,108.75 154.15,106.35 154.15,103.75 154.3,103.75 155.2,102.85 164.55,102.85 164.55,103 167.25,105.7 167.25,107.9 167.15,107.9 166.25,108.8

## Silkscreen, mask and mechanical layers (free items; w line width, h text height)
Top Overlay:
  lines w0.12: 123.137,138.112 123.65,137.6 ; 130.05,168.35 130.2,168.5 133.7,168.5 ; 131.55,168.35 131.7,168.5 ; 131.65,160.45 131.65,165.2 ; 135.1,168.65 131.7,165.25 ; 135.15,167.2 135.15,171.75 ; 131.7,165.25 131.7,165.25
  lines w0.254: 133.2,120.9 133.2,113.7 183.25,113.7 ; 133.25,124.65 133.25,162.3 ; 152.25,173.7 154.7,173.7 ; 159.8,173.7 166.75,173.7 ; 171.3,173.7 181.5,173.7 ; 183.2,112.25 183.25,112.2 ; 183.2,115.55 183.2,120.45 ; 183.2,125.351 183.2,162.55 ; 183.25,165.05 183.25,167.65
  text "RESET" at 208.875,184.3 h0.8 r270
  text "5V" at 198.05,183 h1 r270
  text "USER" at 208.875,177.1 h0.8 r270
  text "3V3" at 198.1,176.7 h1 r270
  text "DVI-D" at 112.4,172.75 h1.52
  text "HPh" at 182,170.15 h1.52
  text "LINE" at 188.65,170.05 h1.52
  text "LINE" at 154.7,169.95 h1.52
  text "MIC" at 167.3,169.85 h1.52
  text "USB OTG" at 141,168.7 h1.52
  text "OUT" at 182,167.95 h1.52
  text "OUT" at 188.5,167.95 h1.52
  text "IN" at 157.15,167.75 h1.52
  text "MONO" at 166.7,167.75 h1.52
  text "LCD EXP" at 100.35,166 h1.45 r270
  text "X2 (SOM)" at 141.05,160.2 h1.52 r270
  text "POWER IN" at 195.15,159.6 h1.52
  text "5VDC" at 195.15,156.95 h1.52
  text "2.5A" at 195.15,154.85 h1.52
  text "X3 (SOM)" at 175.35,149.95 h1.52 r90
  text "Micro SD" at 209.5,143.3 h1.52 r90
  text "CAMERA" at 113.7,142.2 h1.52 r270
  text "EXPANSION" at 100.85,138.6 h1.52 r270
  text "MENTOREL.com" at 187.9,133.8 h4 r90
  text "somiqboard v2" at 190.4,133.7 h3 r90
  text "SOM Ethernet" at 152.05,114 h1.52
  text "MB Ethernet" at 190.95,114 h1.52
  text "USB 1-2" at 108.8,108.6 h1.52
  text "USB 3-4" at 138.5,108.4 h1.52
  text "USB" at 172.7,104.2 h1.52
  text "Serial" at 170.9,101.9 h1.52
Bottom Overlay:
  circle w0.254: c204.184,159.7 r0.141
  lines w0.12: 160.6,167.7 161.3,167.7 ; 165.55,164.75 166,164.3 168,164.3 ; 182.5,182.1 183.1,182.5 ; 189.925,180.975 190.5,180.4 ; 192.35,181.8 193,182.45 ; 195.2,99.6 195.2,100.532 ; 196.75,99.55 196.75,100.532 ; 198,99.55 198,100.532 ; 199.06,99.642 199.81,100.542 ; 201.17,99.534 202.01,100.542 ; 202.559,99.401 203.51,100.542
  text "LCD EXP" at 100.35,155.9 h1.45 r270
  text "EXPANSION" at 100.95,126.85 h1.52 r270
Bottom Solder:
  circle w0.4: c186.65,92.45 r0.2
  circle w0.4: c186.6,94.575 r0.2
  circle w0.4: c186.6,97.875 r0.2
  circle w0.4: c176.8,92.45 r0.2
  circle w0.4: c176.8,94.575 r0.2
  circle w0.4: c176.85,97.875 r0.2
  circle w0.4: c152.05,178.25 r0.2
  circle w0.4: c152.05,181.4 r0.2
  circle w0.4: c152.05,183.55 r0.2
  circle w0.4: c142.25,178.275 r0.2
  circle w0.4: c142.25,181.35 r0.2
  circle w0.4: c142.25,183.55 r0.2
Mechanical 1:
  the board outline again, w0.254
Mechanical 15:
  lines w0.1: 132.8,143.7 182.326,143.7
  lines w0.254: 100,100.025 100,117.123 ; 100,117.018 104.445,117.018 ; 100,130.201 110.389,130.201 ; 100.003,100 106.045,100 ; 100.003,110.033 103.81,110.033 ; 103.81,100 103.81,110.033 ; 104.318,100.025 104.318,154.864 100,154.864 108.763,154.864 ; 137.119,113.671 137.119,117.471 139.419,124.121 ; 137.119,170.271 137.119,173.671 ; 179.727,113.671 179.727,117.071 ; 103.81,110.033 103.81,178.613 174.93,178.613 174.93,110.033 103.81,110.033 ; 100,100 100,185.598 185.09,185.598 185.09,100 100,100 ; 133.2,113.7 183.2,113.7 183.2,173.7 133.2,173.7 133.2,113.7

## Text inside footprints (layer, text, board x,y; h text height)
P9: Top Overlay "1" at 102.25,116.55 h1; Top Overlay "2" at 108.8,116.5 h1; Top Overlay "28" at 108.5,150.1 h1; Bottom Overlay "1" at 101.545,116.818 h1.27 r270; Bottom Overlay "2" at 108.67,116.693 h1.27 r270; Bottom Overlay "28" at 108.62,148.968 h1.27 r270; Bottom Overlay "27" at 101.545,149.043 h1.27 r270
P10: Top Overlay "1" at 110.9,174 h1; Top Overlay "19" at 120.9,173.95 h1
P11: Top Overlay "19" at 102.05,167.75 h1; Top Overlay "1" at 105.5,154.35 h1; Bottom Overlay "1" at 105.473,154.639 h1 r270
P12: Top Overlay "19" at 106.7,167.7 h1; Top Overlay "1" at 109.9,154.4 h1; Bottom Overlay "1" at 109.918,154.639 h1 r270
P18: Top Overlay "2" at 121.65,147.75 h1; Top Overlay "34" at 121.6,127.4 h1; Top Overlay "1" at 114.95,147.8 h1; Top Overlay "33" at 113.7,127.45 h1
P19: Top Overlay "1" at 140.7,163.5 h1 r270; Top Overlay "2" at 132.4,163.8 h1 r270; Top Overlay "100" at 132.4,124.2 h1 r270; Top Overlay "99" at 140.7,124.3 h1 r270
P20: Top Overlay "1" at 183.1,163.5 h1 r270; Top Overlay "2" at 174.8,163.8 h1 r270; Top Overlay "100" at 174.8,124.2 h1 r270; Top Overlay "99" at 183.1,124.3 h1 r270